# Altium PCB lite.PcbDoc
Units mm, origin at the board's own origin, x right, y up, seen from the top; angles counter-clockwise.
Board outline 19.81 x 16.31 mm, 2 copper layers (Top Layer, Bottom Layer); 31 components, 29 nets, 149 pads, 74 vias.
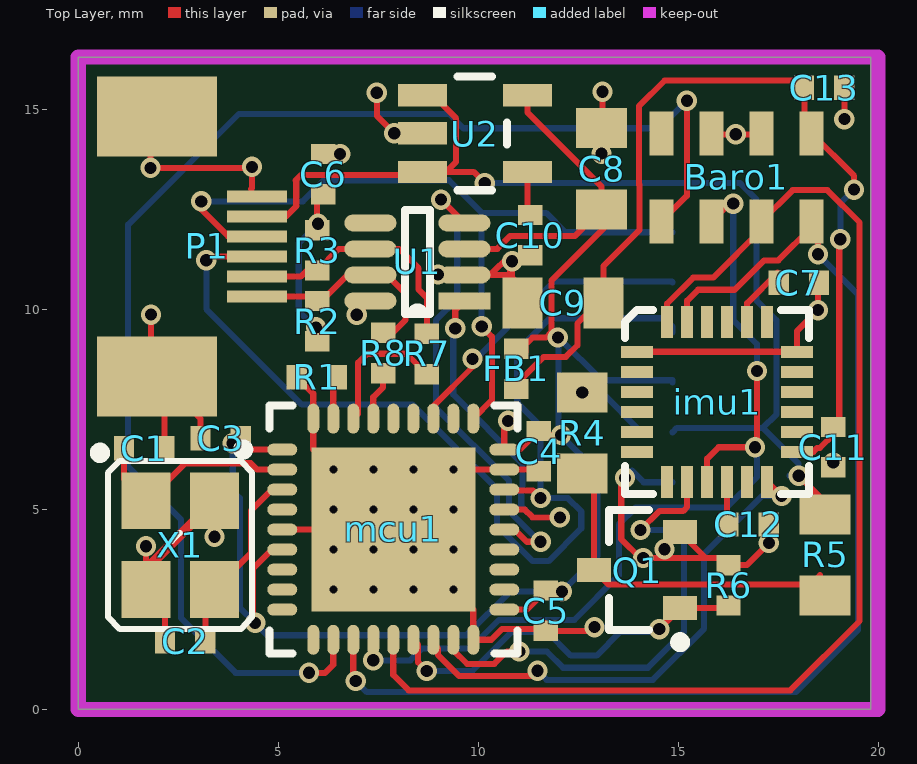
[diagram p0: Top Layer view]
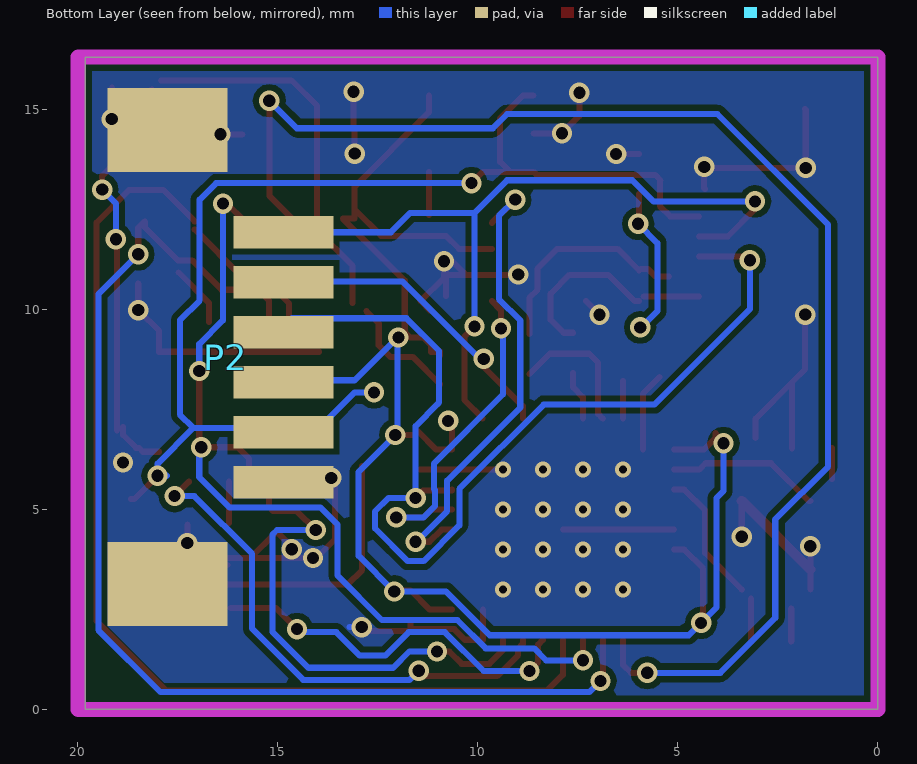
[diagram p1: Bottom Layer view, seen from below]

## Layer stack, top to bottom
Top Solder: solder mask 0.0102, Solder Resist, Dk 3.5
Top Layer: signal copper 0.0356
Dielectric 1: dielectric 0.32, FR-4, Dk 4.8
Bottom Layer: signal copper 0.0356
Bottom Solder: solder mask 0.0102, Solder Resist, Dk 3.5

## Board outline
0,0 0,16.307 19.812,16.307 19.812,0

## Design rules (kind name [scope] priority, off if disabled: settings)
Clearance [All] p1: gap=0.152
DiffPairsRouting [All] p1: maxlimit=0.254 minlimit=0.152 mostfreqgap=0.152 toplayer_minwidth=0.381 toplayer_maxwidth=0.381 toplayer_prefwidth=0.381 bottomlayer_minwidth=0.381 bottomlayer_maxwidth=0.381 bottomlayer_prefwidth=0.381 maxuncoupledlength=12.7
MinimumSolderMaskSliver [All] p1 off: minsoldermaskwidth=0.254
PlaneConnect [All] p1: planeconnectstyle=Direct reliefexpansion=0.508 reliefentries=4 reliefconductorwidth=0.254 reliefairgap=0.254
PolygonConnect [All] p1: connectstyle=Direct reliefconductorwidth=0.254 reliefentries=4 polygonreliefangle="90 Angle" airgapwidth=0.254
RoutingVias [All] p1: holewidth=0.305 width=0.508 viastyle="Through Hole" minholewidth=0.305 minwidth=0.508 maxholewidth=0.711 maxwidth=1.27
SilkToBoardRegionClearance [All] p1 off:
SilkToSilkClearance [All] p1 off: silktosilkclearance=0.254
SilkToSolderMaskClearance [IsPad] p1 off: minsilkscreentomaskgap=0.254 clearancetoexposedcopper=TRUE
SolderMaskExpansion [All] p1 off: expansion=0.102
UnpouredPolygon [All] p1: allowunpoured=FALSE
Width [All] p1: maxlimit=0.254 minlimit=0.152 preferedwidth=0.152
23 further rules are at their usual default settings.

## Components (designator, comment, footprint, x,y, rotation, side; value= is the part's Value field where it differs from the comment)
Baro1 "MS5611" MS5611 14.58,14.402 r270 top
C1 "Cap" 0402 1.651,6.528 r180 top
C2 "Cap" 0402 2.667,1.702 r0 top
C3 "Cap" 0402 3.556,6.782 r0 top
C4 "Cap" 0402 11.506,6.452 r90 top
C5 "Cap" 0402 11.684,2.464 r90 top
C6 "100pF" 0402 6.121,13.386 r270 top
C7 "2.2nF" 0402 18.009,10.668 r0 top
C8 "Cap" 0805 13.081,13.513 r90 top
C9 "Cap" 0805 12.116,10.16 r180 top
C10 "Cap" 0402 11.303,11.862 r270 top
C11 "0.1uF" 0402 18.872,6.553 r90 top
C12 "0.1uF" 0402 16.764,4.623 r180 top
C13 "0.1uF" 0402 18.644,15.545 r0 top
FB1 "Res2" 0402 10.947,8.509 r90 top
imu1 "MPU6050" MPU6050-2 13.97,8.941 r0 top
mcu1 "STM32F103T8U6" VFQN36_V 7.874,4.496 r0 top
P1 "SW_UART_CAN" FPC-0.5mm-6 4.47,12.827 r270 top
P2 "debug_1" WFRSM125 14.859,8.179 r270 bottom
Q1 "NMOS" SOT-23B_L 13.97,3.48 r180 top
R1 "Res2" 0402 5.969,8.306 r180 top
R2 "60R" 0402 5.969,9.703 r90 top
R3 "60R" 0402 5.969,11.481 r270 top
R4 "Res2" 0805 12.598,6.909 r270 top
R5 "Res2" 0805 18.669,3.861 r270 top
R6 "Res2" 0402 16.256,3.099 r90 top
R7 "Res2" 0402 8.712,8.89 r270 top
R8 "Res2" 0402 7.62,8.915 r270 top
U1 "MAX3051" SOT-8 9.652,10.211 r180 top
U2 "LP5907" SOT23-5 9.906,14.402 r270 top
X1 "24.000 KHz 3.2x2.5mm 8-10pf" OSCILLATOR-3.2X2.5 2.54,4.115 r270 top

## Footprints (in the part's own frame and the unit in brackets; to place one, negate y for a bottom-side part, rotate by r counter-clockwise, add the part's x,y. Pads: shape width x height; smd on the part's side, far side on the other; paste and mask are expansions set on the pad)
0402 [mil] "0402-RES"
  rect 20x24 smd: 1(-19.69,0) 2(20,0)
0805 [mm]
  rect 1x1.27 smd: 1(-1.016,0) 2(1.016,0)
  body extent -1.27,-0.76 1.27,0.76, height 0.8
FPC-0.5mm-6 [mm]
  rect 2x3 smd: 0(-2,-2.5) 0(4.5,-2.5)
  rect 0.3x1.5 smd: 1(0,0) 2(0.5,0) 3(1,0) 4(1.5,0) 5(2,0) 6(2.5,0)
MPU6050-2 [mm]
  rect 0.8x0.3 smd: 1(0,0) 2(0,-0.5) 3(0,-1) 4(0,-1.5) 5(0,-2) 6(0,-2.5) 13(4,-2.5) 14(4,-2) 15(4,-1.5) 16(4,-1) 17(4,-0.5) 18(4,0)
  rect 0.3x0.8 smd: 7(0.75,-3.25) 8(1.25,-3.25) 9(1.75,-3.25) 10(2.25,-3.25) 11(2.75,-3.25) 12(3.25,-3.25) 19(3.25,0.75) 20(2.75,0.75) 21(2.25,0.75) 22(1.75,0.75) 23(1.25,0.75) 24(0.75,0.75)
  silkscreen extent -0.3,-3.55 4.3,1.05, body extent 0.25,-2.92 3.68,0.51, height 1
MS5611 [mm]
  rect 1.1x0.6 smd: 1(0,3.75) 2(0,2.5) 3(0,1.25) 4(0,0) 5(2.2,0) 6(2.2,1.25) 7(2.2,2.5) 8(2.2,3.75)
  body extent -0.51,-0.51 2.67,4.32, height 1
OSCILLATOR-3.2X2.5 [mil] "OSCILLATOR-3.2X2.5"
  rect 56x48 smd: 1(-43.31,-33.46) 2(44,-33.46) 3(44,34) 4(-43.31,34)
  silkscreen extent -95,-83 83,71
SOT23-5 [mil] "SOT23-5"
  rect 22x48 smd: 1(-37.4,-51.19) 2(0,-51.19) 3(38,-51.19) 4(38,52) 5(-37.4,52)
  silkscreen extent -56,-17 56,32
SOT-8 [mm]
  rect 1.3x0.42 smd: 1(0,0)
  oval 1.3x0.42 smd: 2(0,-0.65) 3(0,-1.3) 4(0,-1.95) 5(2.35,-1.95) 6(2.35,-1.3) 7(2.35,-0.65) 8(2.35,0)
  silkscreen extent 0.87,-2.28 1.48,0.33
SOT-23B_L [mm] "SOT23, 3-Leads, Body 2.9x1.3mm, Pitch 0.95mm, Lead Span 2.4mm, IPC High Density"
  rect 0.85x0.6 smd: 1(-1.075,0.95) 2(-1.075,-0.95) 3(1.075,0)
  silkscreen extent -1.2,-1.5 0.7,1.92, body extent -0.7,-1.5 0.7,1.5, height 1.14
VFQN36_V [mm]
  rect 4.1x4.1 smd: 0(0,0)
  oval 0.75x0.3 smd: 1(-2.775,2) 2(-2.775,1.5) 3(-2.775,1) 4(-2.775,0.5) 5(-2.775,0) 6(-2.775,-0.5) 7(-2.775,-1) 8(-2.775,-1.5) 9(-2.775,-2) 19(2.775,-2) 20(2.775,-1.5) 21(2.775,-1) 22(2.775,-0.5) 23(2.775,0) 24(2.775,0.5) 25(2.775,1) 26(2.775,1.5) 27(2.775,2)
  oval 0.3x0.75 smd: 10(-2,-2.755) 11(-1.5,-2.755) 12(-1,-2.755) 13(-0.5,-2.755) 14(0,-2.755) 15(0.5,-2.755) 16(1,-2.755) 17(1.5,-2.755) 18(2,-2.755) 28(2,2.775) 29(1.5,2.775) 30(1,2.775) 31(0.5,2.775) 32(0,2.775) 33(-0.5,2.775) 34(-1,2.775) 35(-1.5,2.775) 36(-2,2.775)
  silkscreen extent -3.87,-3.1 3.1,3.1
WFRSM125 [mm]
  rect 0.81x2.5 smd: 1(-3.75,0) 2(-2.5,0) 3(-1.25,0) 4(0,0) 5(1.25,0) 6(2.5,0)
  rect 2.1x3 smd: shell(-6.3,-2.9) shell(5.05,-2.9)
  body extent -6.79,-3.82 5.46,0.38, height 3.4

## Part data
C1 C2 C3 C4 C5 C8 C9 C10: "Capacitor"
C6: library part CAP0402-CAP, "电容"
C7 C11 C12: library part Cap, "Capacitor"
C13: library part CAP0402-CAP, "<b>Capacitor</b> / Standard 0603 ceramic capacitor, and 0.1\" leaded capacitor."
FB1 R1 R4 R5 R6 R7 R8: "Resistor"
mcu1: "STM32 ARM-based 32-bit MCU with 64 Kbytes Flash, 36-pin VFQFPN, Industrial Temperature"
R2 R3: library part Res2, "电阻"
X1: library part OSCILLATOR-3.2X2.5, "Crystal Oscillator in 3.2x2.5 SMD"

## Via types
v1: diameter 0.508, hole 0.305, Top Layer to Bottom Layer, 58 vias
v2: diameter 0.4, hole 0.2, Top Layer to Bottom Layer, tented both sides, 16 vias

## Nets (pads, with @x,y where several pads share a name; then routed paths per layer and width w, separated by ;. In a path a pad name is that pad's centre, name@x,y a point inside that pad or via, vN(x,y) a via of type N, cw(c..) or ccw(c..) an arc to the next point about the centre after c; other vN are vias at no path point)
3.3A: Baro1.1 C9.1 C11.2 C13.1 FB1.1 imu1.13 | length 22.6
  Top Layer w0.152: FB1.1@10.947,8.128 11.633,8.814 12.189,8.814 12.479,9.105 12.479,9.65 C9.1@12.786,9.957 ; C9.1 13.132,11.089 14.026,11.983 14.026,13.12 14.021,13.115 14.021,15.088 14.656,15.723 C13.1@17.924,15.723 ; imu1.13 18.378,6.441 18.473,6.536 18.542,6.536 18.872,6.866 C11.2 ; Baro1.1@18.153,14.578 C13.1@18.153,15.494 ; Baro1.1 19.393,13.338 v1(19.393,12.994) ; C11.2@19.025,6.974 19.025,11.729 v1(19.05,11.754)
  Bottom Layer w0.152: v1(19.05,11.754) 19.05,12.651 v1(19.393,12.994)
3.3D: C3.2 C4.2 C5.2 C8.1 FB1.2 mcu1.1 mcu1.6 mcu1.19 mcu1.27 P2.4 U1.3 U2.5 | length 44.4
  Top Layer w0.152: v1(3.861,6.655) 3.861,6.706 4.064,6.909 C3.2 4.35,6.496 mcu1.1 ; v1(4.42,2.163) 4.369,2.214 4.369,3.526 4.839,3.996 mcu1.6 ; U1.3 10.473,11.511 10.798,11.836 12.421,11.836 C8.1 ; mcu1.19 11.208,2.496 C5.2 12.09,2.972 v1(12.09,2.946) ; v1(10.744,7.214) 10.649,7.118 mcu1.27 11.042,6.496 C4.2 11.608,6.858 v1(12.065,6.858) ; FB1.2@10.947,8.843 10.947,8.941 11.176,8.941 11.176,9.118 11.355,9.296 11.694,9.296 11.828,9.43 11.828,10.721 13.375,12.268 13.081,12.268 C8.1 ; U2.5 11.227,14.925 13.081,13.071 C8.1 ; v1(11.989,9.296) v1@12.002,9.309
  Bottom Layer w0.152: v1(3.861,6.655) 3.861,5.458 4.039,5.28 4.039,2.544 v1(4.42,2.163) 4.729,1.854 9.704,1.854 10.796,2.946 v1(12.09,2.946) 12.984,3.84 12.984,5.939 v1(12.065,6.858) 12.006,6.799 v1@12.006,9.304 ; v1@10.693,7.264 v1(10.744,7.214) ; v1(11.989,9.296) 12.014,9.296 13.081,8.23 14.859,8.23 P2.4
5V: P1.2 P2.5 R4.1 R5.1 U2.1 U2.3 | length 29.1
  Top Layer w0.152: P1.2 5.194,12.327 5.449,12.582 5.449,13.213 5.436,13.227 5.57,13.36 8.53,13.36 U2.3 U2.3@9.195,13.437 ; U2.1 8.868,15.352 9.444,14.776 9.444,13.686 U2.3@9.195,13.437 ; v1(10.16,13.157) 9.881,13.437 U2.3@9.195,13.437 ; v1(18.009,5.842) 18.593,5.258 R5.1@18.669,5.258
  Bottom Layer w0.152: v1(10.16,13.157) 16.543,13.157 16.958,12.742 16.958,10.22 17.45,9.728 17.45,7.369 17.116,7.036 ; v1(12.598,7.925) 13.081,7.925 P2.5@14.077,6.929 ; P2.5 14.966,7.036 17.116,7.036 ; v1@17.78,5.842 v1(18.009,5.842) 18.009,6.143 17.116,7.036
CAN_N: P1.5 R3.2 R7.1 U1.6 | length 5.5
  Top Layer w0.152: 5.226,10.82 5.559,10.82 5.744,11.005 R3.2@5.937,11.005 ; R3.2 6.507,11.511 U1.6 8.022,11.511 8.509,11.024 8.509,10.495 8.712,10.292 R7.1
CAN_P: P1.6 R2.2 R8.1 U1.7 | length 5.4
  Top Layer w0.152: P1.6 R2.2@5.853,10.327 ; R2.2 6.089,10.211 6.739,10.861 U1.7 7.712,10.861 8.181,10.392 8.181,9.741 7.855,9.415 R8.1
GND: Baro1.2 Baro1.3 C1.1 C2.1 C3.1 C4.1 C5.1 C6.1 C7.2 C8.2 C9.2 C10.2 C11.1 C12.1 C13.2 imu1.1 imu1.18 mcu1.0 mcu1.5 mcu1.18 mcu1.26 mcu1.36 P1.0 P1.1 P2.6 P2.shell Q1.2 R1.2 R6.2 U1.2 U1.8 U2.2 X1.2 X1.4 | length 53.1
  Top Layer w0.152: X1.2 1.69,3.499 v1(1.69,4.078) ; v1(1.818,9.87) 1.818,8.505 P1.0@2.151,8.172 ; P1.0@1.818,15.005 1.803,14.99 v1(1.803,13.538) v1@4.318,13.538 ; C1.1 P1.0@2.151,8.172 ; C2.1 X1.2@2.167,2.52 ; C3.1 3.056,7.267 P1.0@2.151,8.172 ; v1(3.404,4.318) 3.404,5.212 X1.4 ; 4.318,13.005 4.343,13.03 v1(4.343,13.564) ; mcu1.5 mcu1.0 ; R1.2 5.874,7.893 mcu1.36 mcu1.0@5.874,6.496 ; C6.1@5.969,13.886 v1(6.545,13.886) ; v1(6.96,9.868) U1.8 ; v1(7.463,15.418) 7.463,14.838 v1(7.899,14.402) U2.2 ; v1(8.992,10.871) 8.981,10.861 U1.2 10.302,10.861 ; v2(9.374,5.996) mcu1.26 C4.1@11.462,5.996 ; mcu1.0@9.874,2.496 mcu1.18 10.324,1.741 10.59,2.007 11.641,2.007 C5.1 ; C9.2@10.795,10.338 10.795,10.861 ; v1(10.846,11.201) 10.846,10.861 ; C9.2@11.176,9.957 11.43,10.211 10.846,10.795 10.846,10.861 ; C5.1@11.684,2.159 C5.1 ; v1(12.903,2.057) 12.81,1.964 C5.1 ; v1(13.081,13.894) C8.2 13.106,14.529 v1(13.106,15.443) ; v1(13.665,5.787) 13.572,5.694 13.572,4.258 14.046,3.785 v1(14.122,3.785) 15.69,3.785 Q1.2 15.022,4.43 14.656,4.064 v1(14.656,4.002) ; imu1.1 imu1.18 17.97,9.461 v1(18.491,9.982) C7.2@18.491,10.643 ; 15.69,3.785 R6.2@16.256,3.785 ; Baro1.3@15.88,14.376 v1(16.434,14.376) Baro1.2@17.13,14.376 ; R6.2 16.713,3.607 v1(17.264,4.158) C12.1 ; C11.1 v1(18.872,6.172) ; v1(19.152,14.757) C13.2 ; 10.302,10.861 10.795,10.861 ; 10.302,10.861 10.795,11.354 10.795,10.861 ; 10.795,10.861 10.846,10.861
  Top Layer w0.254: X1.2@1.69,3.499 X1.4@3.404,5.212
  Bottom Layer w0.152: v1@8.865,10.871 v1(8.992,10.871) ; v1(12.903,2.057) 13.208,2.057 ; P2.6@13.844,5.966 14.131,5.679 P2.6 ; v1@14.645,4.013 v1(14.656,4.002)
  other v2: 6.374,2.996 7.374,2.996 8.374,2.996 9.374,2.996 6.374,3.996 7.374,3.996 8.374,3.996 9.374,3.996 6.374,4.996 7.374,4.996 8.374,4.996 9.374,4.996 6.374,5.996 7.374,5.996 8.374,5.996
NetBaro1_5: Baro1.5 mcu1.11 | length 34.3
  Top Layer w0.152: v1(5.766,0.914) 6.172,0.914 6.374,1.116 mcu1.11 ; Baro1.5 15.215,12.837 v1(15.215,15.215)
  Bottom Layer w0.152: v1(5.766,0.914) 3.937,0.914 2.565,2.286 2.565,4.75 1.245,6.071 1.245,12.116 4.013,14.884 9.271,14.884 9.627,14.529 14.529,14.529 v1(15.215,15.215)
NetBaro1_6: Baro1.6 imu1.9 mcu1.13 | length 22.4
  Top Layer w0.152: v1(7.374,1.227) mcu1.13 ; imu1.9 15.72,6.266 16.007,6.553 v1(16.916,6.553) ; Baro1.6 16.272,12.644 v1(16.373,12.644) ; v1@16.967,6.604 v1(16.967,8.458)
  Bottom Layer w0.152: v1(7.374,1.227) 8.297,1.227 8.594,1.524 9.804,1.524 10.516,2.235 12.399,2.235 13.513,3.349 13.513,4.625 13.933,5.045 16.204,5.045 16.967,5.809 v1@16.967,6.502 ; v1(16.373,12.644) 16.373,9.725 16.967,9.131 v1(16.967,8.458) v1@16.967,8.407
NetBaro1_7: Baro1.7 imu1.24 mcu1.14 | length 30.1
  Top Layer w0.152: mcu1.14 7.874,0.864 8.261,0.477 17.8,0.477 19.533,2.21 19.533,12.172 18.724,12.98 17.858,12.98 Baro1.7 ; imu1.24 14.72,10.147 15.368,10.795 15.875,10.795 Baro1.7@17.08,12
NetBaro1_8: Baro1.8 imu1.23 mcu1.12 | length 29.7
  Top Layer w0.152: mcu1.12 6.874,0.771 v1(6.934,0.711) ; imu1.23 15.22,10.216 15.494,10.49 16.408,10.49 17.145,11.227 17.501,11.227 18.33,12.056 Baro1.8 18.491,12.04 v1(18.491,11.379)
  Bottom Layer w0.152: v1@6.891,0.754 v1(6.934,0.711) 7.214,0.432 17.935,0.432 19.488,1.984 19.488,10.383 v1(18.491,11.379)
NetC1_2: C1.2 mcu1.2 X1.1 | length 4.6
  Top Layer w0.152: X1.1@1.143,5.762 C1.2 ; X1.1 1.735,5.215 2.675,6.155 4.31,6.155 4.469,5.996 mcu1.2
NetC2_2: C2.2 mcu1.3 X1.3 | length 4.4
  Top Layer w0.152: C2.2 X1.3@3.175,2.769 ; X1.3 4.318,3.912 4.318,4.975 4.839,5.496 mcu1.3
NetC6_2: C6.2 R2.1 R3.1 | length 4
  Top Layer w0.152: R2.1@5.944,9.439 v1(5.944,9.55) ; R3.1 C6.2@5.969,12.878
  Bottom Layer w0.152: v1(5.944,9.55) 5.918,9.55 5.512,9.957 5.512,11.659 v1(5.994,12.141)
NetC7_1: C7.1 imu1.20 | length 1.5
  Top Layer w0.152: imu1.20 16.72,10.159 C7.1@17.483,10.922
NetC10_1: C10.1 U2.4 | length 1.1
  Top Layer w0.152: C10.1@11.227,12.362 U2.4
NetC12_2: C12.2 imu1.10 | length 1
  Top Layer w0.152: C12.2@16.22,4.659 imu1.10
Netimu1_8: imu1.8 mcu1.17 | length 12.4
  Top Layer w0.152: mcu1.17 9.374,1.48 9.717,1.137 10.403,1.137 10.714,1.448 v1(11.024,1.448) ; v1(14.055,4.485) 14.055,4.488 14.525,4.958 15.118,4.958 15.22,5.06 imu1.8
  Bottom Layer w0.152: v1(11.024,1.448) 11.713,1.448 12.119,1.041 14.239,1.041 15.138,1.941 15.138,4.369 15.023,4.485 v1(14.055,4.485)
Netimu1_12: imu1.12 mcu1.16 | length 12.9
  Top Layer w0.152: mcu1.16 8.874,1.626 8.887,1.626 8.995,1.517 8.995,1.359 9.522,0.832 11.348,0.832 v1(11.481,0.965) ; imu1.12@17.226,5.691 v1(17.583,5.334)
  Bottom Layer w0.152: v1(11.481,0.965) 11.709,0.737 14.365,0.737 15.646,2.018 15.646,3.889 17.091,5.334 v1(17.583,5.334)
Netmcu1_15: mcu1.15 Q1.1 R6.1 | length 9.5
  Top Layer w0.152: mcu1.15 8.495,1.619 8.495,1.176 v1(8.712,0.959) ; v1(14.522,2.007) Q1.1 R6.1@16.187,2.53
  Bottom Layer w0.152: v1(8.712,0.959) 9.853,0.959 10.824,1.93 11.729,1.93 12.313,1.346 12.956,1.346 13.54,1.93 14.446,1.93 v1(14.522,2.007)
Netmcu1_23: mcu1.23 U1.4 | length 11.9
  Top Layer w0.152: v1(9.068,12.745) U1.4 ; mcu1.23 10.909,4.496 11.214,4.191 v1(11.557,4.191)
  Bottom Layer w0.152: v1(9.068,12.745) 9.474,12.339 9.474,10.258 8.941,9.725 8.941,7.544 10.77,5.715 10.77,4.957 v1@11.532,4.194
Netmcu1_24: mcu1.24 U1.1 | length 8.5
  Top Layer w0.152: v1(9.423,9.525) 9.423,9.982 U1.1 ; mcu1.24 11.162,4.996 11.357,4.801 v1(12.04,4.801)
  Bottom Layer w0.152: v1(9.423,9.525) 9.373,9.474 9.373,7.874 11.1,6.147 11.1,5.508 11.074,5.483 11.074,5.083 11.357,4.801 v1(12.04,4.801)
Netmcu1_25: mcu1.25 P1.4 P2.3 | length 26.3
  Top Layer w0.152: v1@3.2,11.327 P1.4 ; mcu1.25 10.649,5.469 11.371,5.469 v1(11.557,5.283)
  Bottom Layer w0.152: v1(3.2,11.227) 3.2,10.008 5.588,7.62 8.356,7.62 10.465,5.511 10.465,4.601 11.357,3.708 11.757,3.708 12.573,4.525 12.573,4.95 12.239,5.283 v1(11.557,5.283) 11.557,7.083 10.998,7.642 10.998,7.645 10.973,7.671 10.973,8.963 11.789,9.779 14.648,9.779 14.859,9.568 P2.3
Netmcu1_28: mcu1.28 P1.3 P2.1 | length 19.8
  Top Layer w0.152: v1@3.073,12.501 3.747,11.827 P1.3 ; v1@3.073,12.526 v1(3.073,12.7) ; mcu1.28@9.881,7.277 10.338,7.735 10.338,9.322 v1(10.084,9.576)
  Bottom Layer w0.152: v1(3.073,12.7) 5.613,12.7 6.141,13.228 9.268,13.228 10.084,12.412 ; v1(10.084,9.576) 10.084,12.412 ; P2.1 12.176,11.929 11.693,12.412 10.084,12.412
Netmcu1_30: mcu1.30 P2.2 | length 7.7
  Top Layer w0.152: mcu1.30 8.874,7.579 9.855,8.56 v1(9.855,8.763)
  Bottom Layer w0.152: v1(9.855,8.763) 9.953,8.763 11.884,10.693 14.844,10.693 P2.2
Netmcu1_33: mcu1.33 R8.2 | length 1.2
  Top Layer w0.152: mcu1.33 7.374,7.806 7.62,8.052 R8.2
Netmcu1_34: mcu1.34 R7.2 | length 3.5
  Top Layer w0.152: mcu1.34 6.995,7.392 6.995,8.665 7.22,8.89 8.204,8.89 R7.2
Netmcu1_35: mcu1.35 R1.1 | length 0.9
  Top Layer w0.152: mcu1.35 R1.1@6.374,8.211
NetQ1_D: Q1.3 R4.2 R5.2 | length 8.5
  Top Layer w0.152: R4.2@12.895,6.079 Q1.3 13.251,3.124 18.313,3.124 18.542,3.353
NetU1_5: U1.5
pads on no net: Baro1.4 imu1.2 imu1.3 imu1.4 imu1.5 imu1.6 imu1.7 imu1.11 imu1.14 imu1.15 imu1.16 imu1.17 imu1.19 imu1.21 imu1.22 mcu1.4 mcu1.7 mcu1.8 mcu1.9 mcu1.10 mcu1.20 mcu1.21 mcu1.22 mcu1.29 mcu1.31 mcu1.32

## Polygon pours and split planes (outlines as drawn)
GND on Bottom Layer "Top Layer-No Net" (solid, remove dead copper, pour order 2): -0.381,16.815 -0.254,16.688 20.574,16.688 20.574,0.305 20.447,0.178 -0.381,0.178

## Keep-outs
Keep-Out Layer:
  lines w0.381: 0,0 0,16.307 19.99,16.307 19.99,0 0,0